# Altium PCB PCB1.PcbDoc
Units mil, origin at the board's own origin, x right, y up, seen from the top; angles counter-clockwise.
Board outline 625 x 630 mil, 2 copper layers (Top Layer, Bottom Layer); 3 components, 3 nets, 6 pads, 0 vias.
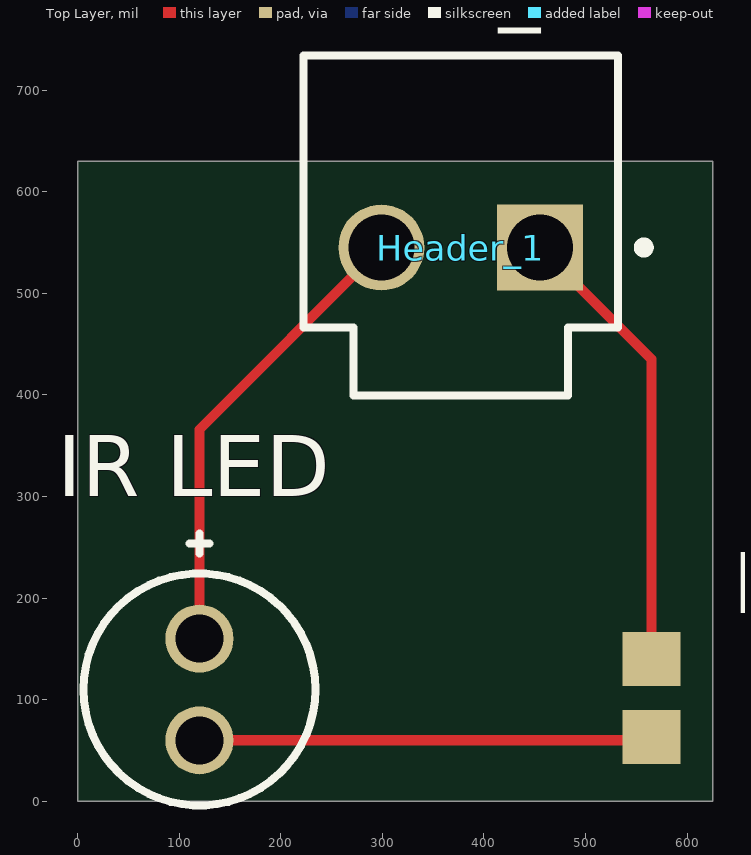
[diagram p0: Top Layer view]
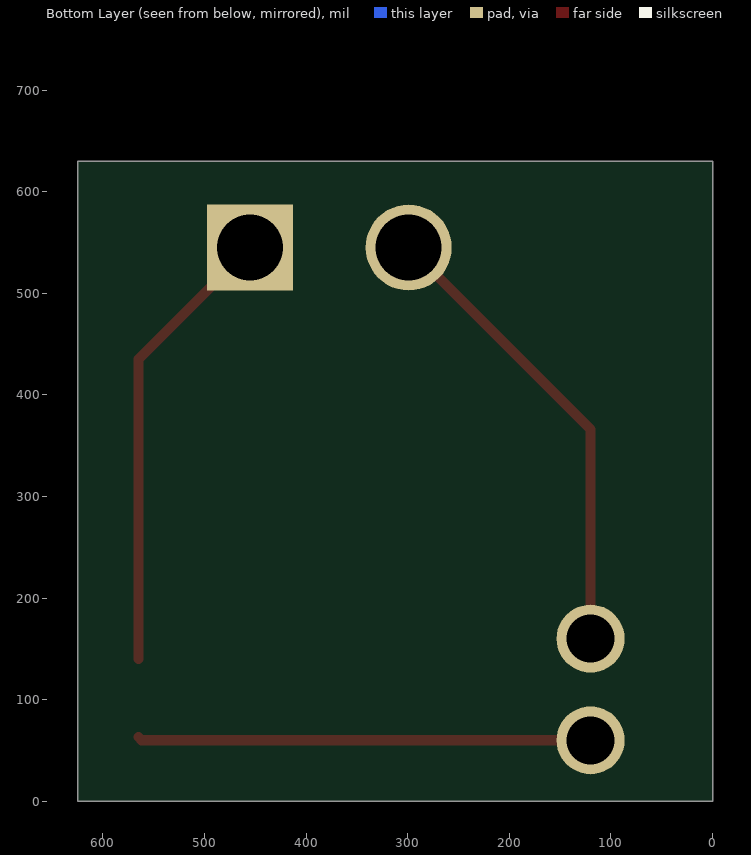
[diagram p1: Bottom Layer view, seen from below]

## Layer stack, top to bottom
Top Solder: solder mask 0.4, Solder Resist, Dk 3.5
Top Layer: signal copper 1.4
Dielectric 1: dielectric 12.6, FR-4, Dk 4.8
Bottom Layer: signal copper 1.4
Bottom Solder: solder mask 0.4, Solder Resist, Dk 3.5

## Board outline
0,0 625,0 625,630 0,630

## Design rules (kind name [scope] priority, off if disabled: settings)
Clearance [All] p1: gap=10 ignorepadtopadclearanceinfootprint=FALSE
PolygonConnect [All] p1: connectstyle=Relief reliefconductorwidth=10 reliefentries=4 polygonreliefangle="90 Angle" airgapwidth=10
RoutingVias [All] p1: holewidth=28 width=50 viastyle="Through Hole" minholewidth=28 minwidth=50 maxholewidth=28 maxwidth=50
SolderMaskExpansion [All] p1: expansion=4 istentingtop=FALSE
Width [All] p1: maxlimit=10 minlimit=10 preferedwidth=10
30 further rules are at their usual default settings.

## Components (designator, comment, footprint, x,y, rotation, side; value= is the part's Value field where it differs from the comment)
Header_1 "B2P-VH(LF)(SN)" JST-B2P-VH(LF)(SN)_V 377.05,600.12 r180 top
"IR LED" "TSAL6200" VISH-TSAL6200 120,110 r270 top
R "Resistor 330k +/-1% 0805 125 mW" RESC2013X70X40ML20T20 565,101.61 r90 top

## Footprints (in the part's own frame and the unit in brackets; to place one, negate y for a bottom-side part, rotate by r counter-clockwise, add the part's x,y. Pads: shape width x height; smd on the part's side, far side on the other; paste and mask are expansions set on the pad)
JST-B2P-VH(LF)(SN)_V [mm] "THD, 2-Leads, Body 8.5x7.86mm, Pitch 3.96mm"
  rect 2.15x2.15 hole 1.65: 1(-1.98,1.4)
  round 2.15 hole 1.65: 2(1.98,1.4)
  silkscreen extent -4.71,-3.4 3.93,5.1, body extent -3.93,-3.2 3.93,5.3, height 10.9
RESC2013X70X40ML20T20 [mm] "Chip Resistor, 2-Leads, Body 2.2x1.35mm, IPC Low Density"
  rect 1.35x1.45 smd: 1(-0.975,0) 2(0.975,0)
  body extent -1.1,-0.67 1.1,0.67, height 0.7
VISH-TSAL6200 [mm] "THD, 2-Leads, Dia 5.8mm, Pitch 2.54mm"
  round 1.7 hole 1.2: 1(-1.27,0) 2(1.27,0)
  silkscreen extent -3.9,-2.9 2.9,2.9

## Part data
Header_1: library part CMP-002-00025-2, "Male Header, Pitch 3.96 mm, 1 x 2 Position, Height 10.9 mm, Tail Length 3.7 mm, -25 to 85 degC, RoHS, Bulk", Manufacturer=JST, Max Operating Temperature=85°C, Min Operating Temperature=-25°C, Package Description="Male Header, Pitch 3.96 mm, 1 x 2 Position, Height 10.9 mm, Tail Length 3.7 mm", Case/Package=B2P-VH(LF)(SN), Connector Type=Header, Datasheet URL=http://www.jst-mfg.com/product/pdf/eng/eVH.pdf, Datasheet Version=May-16, Gender=Male, Manufacturer URL=http://www.jst.com/home2.html, Mounting Technology=TH, Package Reference=B2P-VH(LF)(SN), RoHS Compliant=Unknown
"IR LED": library part CMP-2000-07327-1, "High Power Infrared Emitting Diode, GaAlAs, MQW, 1.35 V, 100 mA, -40 to 85 degC, 2-Pin THD, RoHS, Bulk", Forward Current=100mA, Forward Voltage=3V, Manufacturer=Vishay, Operating Temp Range=-40Cto85C, Operating Temperature Classification=Industrial, Package Description="2-Pin Through Hole Device, Dia 5.8 mm, Pitch 2.54 mm", Package Type=T-13/4, Power Dissipation=160W, Reverse Voltage=5V, Chip Material=GaAlAs, Datasheet URL=http://www.vishay.com/docs/81010/tsal6200.pdf, Datasheet Version="Rev. 2.4, 03/2014", DELETED=Compliant, High Brightness=Yes, Lens Dimensions=5x5x7.7mm, Lens Type=Colored, Lum Intensity=500mW/srmcd, Luminous Intensity=500mW/sr, Main Category=IrLED, Manufacturer URL=http://www.vishay.com/, Mounting=ThroughHole, Mounting Technology=ThroughHole, Number of  Elements=1, Package Reference=TSAL6200, Packaging=Bulk, Peak Wavelength=950nm, Pin Count=2, Product Depth (mm)=5.8mm, Product Height (mm)=8.7mm, Product Length (mm)=5.8mm, Rad Hardened=No, Shape Type=Circular, Test Current (It)=100mA, Type=IrLED, Viewing Angle=34deg
R: library part CMP-009-00010-5, "Chip Resistor, 330 KOhm, +/- 1%, 0.125 W, -55 to 155 degC, 0805 (2013 Metric)", Case/Package=0805, Max Operating Temperature=155°C, Min Operating Temperature=-55°C, Power=125mW, Tolerance=1%, Voltage Rating=150V, Mounting Technology=SM, Pins=2, R=330k, RoHS Compliant=True

## Nets (pads, with @x,y where several pads share a name; then routed paths per layer and width w, separated by ;. In a path a pad name is that pad's centre, name@x,y a point inside that pad or via, vN(x,y) a via of type N, cw(c..) or ccw(c..) an arc to the next point about the centre after c; other vN are vias at no path point)
NetHeader_1_1: Header_1.1 R.2 | length 450.6
  Top Layer w10: Header_1.1 565,435 R.2
NetHeader_1_2: "IR LED.1" Header_1.2 | length 459.2
  Top Layer w10: 120,160 120,365.91 Header_1.2
"NetIR LED_2": "IR LED.2" R.1 | length 446.3
  Top Layer w10: 120,60 561.77,60 R.1